# Altium PCB NTC_5_Shoulder.PcbDoc
Units mm, origin at the board's own origin, x right, y up, seen from the top; angles counter-clockwise.
Board outline 140 x 10 mm, 2 copper layers (Top Layer, Bottom Layer); 22 components, 10 nets, 22 pads, 0 vias.
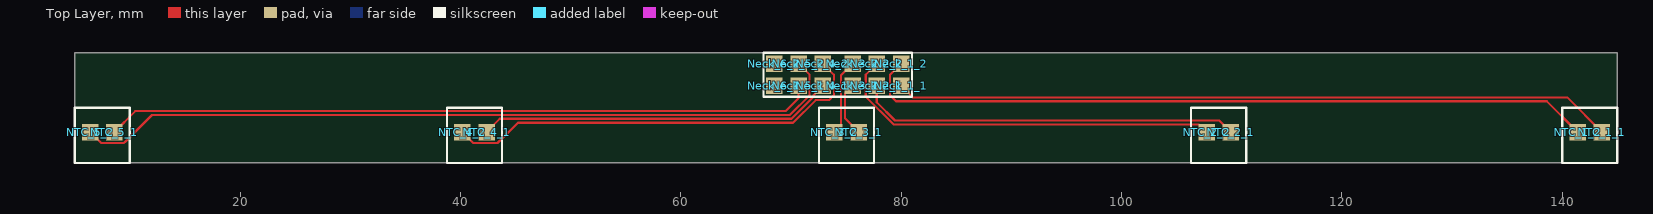
[diagram p0: Top Layer view]
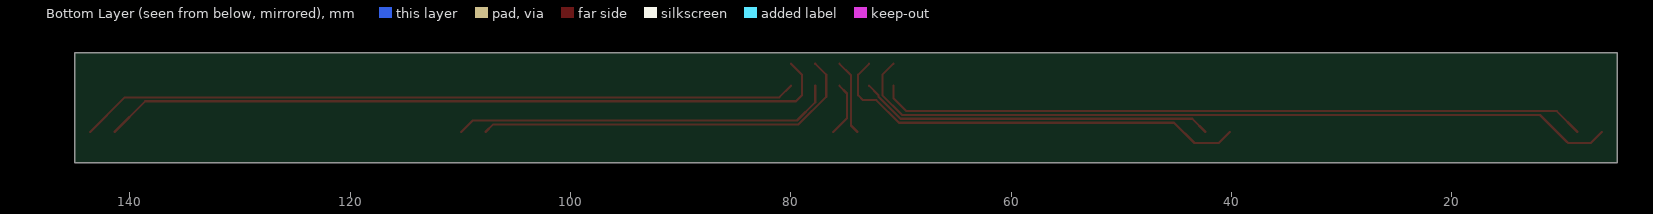
[diagram p1: Bottom Layer view, seen from below]

## Layer stack, top to bottom
Top Solder: solder mask 0.0102, Solder Resist, Dk 3.5
Top Layer: signal copper 0.035
Dielectric 1: dielectric 0.32, FR-4, Dk 4.8
Bottom Layer: signal copper 0.035
Bottom Solder: solder mask 0.0102, Solder Resist, Dk 3.5

## Board outline
5,5 145,5 145,15 5,15

## Design rules (kind name [scope] priority, off if disabled: settings)
Clearance [All] p1: gap=0.15 ignorepadtopadclearanceinfootprint=FALSE except(0: Arc-Hole Track-Hole SMDPad-Hole THPad-Hole Via-Hole Fill-Hole Poly-Hole Region-Hole Text-Hole)
PolygonConnect [All] p1: connectstyle=Relief reliefconductorwidth=0.254 reliefentries=4 polygonreliefangle="90 Angle" airgapwidth=0.254
RoutingVias [All] p1: holewidth=0.5 width=1 viastyle="Through Hole" minholewidth=0.3 minwidth=0.45 maxholewidth=6.3 maxwidth=10
SolderMaskExpansion [All] p1: expansion=0.102 istentingtop=FALSE
Width [All] p1: maxlimit=5 minlimit=0.15 preferedwidth=0.25 minimp=50.000000 maximp=50.000000 favimp=50.000000
30 further rules are at their usual default settings.

## Classes and differential pairs
component class NTC_Neck5: Neck_1_2 Neck_2_2 Neck_4_1 Neck_4_2 Neck_5_2 Neck_6_2 NTC_1_2 NTC_2_1 NTC_2_2 NTC_3_2 NTC_5_2

## Components (designator, comment, footprint, x,y, rotation, side; value= is the part's Value field where it differs from the comment)
Neck_1_1 "Pad" Generic_Pad_1.5x1.5#1 133.9,16.65 r90 top
Neck_1_2 "Pad" Generic_Pad_1.5x1.5#2 130.9,19.4 r90 top
Neck_2_1 "Pad" Generic_Pad_1.5x1.5#3 116,16.7 r90 top
Neck_2_2 "Pad" Generic_Pad_1.5x1.5#4 110.1,19.55 r90 top
Neck_3_1 "Pad" Generic_Pad_1.5x1.5#5 95.9,16.95 r90 top
Neck_3_2 "Pad" Generic_Pad_1.5x1.5#6 91.7,19.6 r90 top
Neck_4_1 "Pad" Generic_Pad_1.5x1.5#7 74.9,16.85 r90 top
Neck_4_2 "Pad" Generic_Pad_1.5x1.5#8 69.35,19.75 r90 top
Neck_5_1 "Pad" Generic_Pad_1.5x1.5#9 55.2,17.45 r90 top
Neck_5_2 "Pad" Generic_Pad_1.5x1.5#10 50.3,20.9 r90 top
Neck_6_1 "Pad" Generic_Pad_1.5x1.5#11 33.75,17.85 r90 top
Neck_6_2 "Pad" Generic_Pad_1.5x1.5#12 30.1,20.25 r90 top
NTC_1_1 "Pad" Generic_Pad_1.5x1.5#13 139.45,7.85 r90 top
NTC_1_2 "Pad" Generic_Pad_1.5x1.5#14 127.2,7.85 r90 top
NTC_2_1 "Pad" Generic_Pad_1.5x1.5#15 114.25,7.85 r90 top
NTC_2_2 "Pad" Generic_Pad_1.5x1.5#16 101.3,7.85 r90 top
NTC_3_1 "Pad" Generic_Pad_1.5x1.5#17 80.6,7.85 r90 top
NTC_3_2 "Pad" Generic_Pad_1.5x1.5#18 69.1,7.85 r90 top
NTC_4_1 "Pad" Generic_Pad_1.5x1.5#19 57.1,7.85 r90 top
NTC_4_2 "Pad" Generic_Pad_1.5x1.5#20 46,7.85 r90 top
NTC_5_1 "Pad" Generic_Pad_1.5x1.5#21 34.15,8.1 r90 top
NTC_5_2 "Pad" Generic_Pad_1.5x1.5#22 23.1,8 r90 top

## Footprints (in the part's own frame and the unit in brackets; to place one, negate y for a bottom-side part, rotate by r counter-clockwise, add the part's x,y. Pads: shape width x height; smd on the part's side, far side on the other; paste and mask are expansions set on the pad)
Generic_Pad_1.5x1.5#1 [mm] "1.5mm x 1.5mm Pad"
  rect 1.5x1.5 smd: P(-4.65,53.9)
Generic_Pad_1.5x1.5#2 [mm] "1.5mm x 1.5mm Pad"
  rect 1.5x1.5 smd: P(-5.4,50.9)
Generic_Pad_1.5x1.5#3 [mm] "1.5mm x 1.5mm Pad"
  rect 1.5x1.5 smd: P(-4.7,38.2)
Generic_Pad_1.5x1.5#4 [mm] "1.5mm x 1.5mm Pad"
  rect 1.5x1.5 smd: P(-5.55,32.3)
Generic_Pad_1.5x1.5#5 [mm] "1.5mm x 1.5mm Pad"
  rect 1.5x1.5 smd: P(-4.95,20.3)
Generic_Pad_1.5x1.5#6 [mm] "1.5mm x 1.5mm Pad"
  rect 1.5x1.5 smd: P(-5.6,16.1)
Generic_Pad_1.5x1.5#7 [mm] "1.5mm x 1.5mm Pad"
  rect 1.5x1.5 smd: P(-4.85,2)
Generic_Pad_1.5x1.5#8 [mm] "1.5mm x 1.5mm Pad"
  rect 1.5x1.5 smd: P(-5.75,-3.55)
Generic_Pad_1.5x1.5#9 [mm] "1.5mm x 1.5mm Pad"
  rect 1.5x1.5 smd: P(-5.45,-15.5)
Generic_Pad_1.5x1.5#10 [mm] "1.5mm x 1.5mm Pad"
  rect 1.5x1.5 smd: P(-6.9,-20.4)
Generic_Pad_1.5x1.5#11 [mm] "1.5mm x 1.5mm Pad"
  rect 1.5x1.5 smd: P(-5.85,-34.75)
Generic_Pad_1.5x1.5#12 [mm] "1.5mm x 1.5mm Pad"
  rect 1.5x1.5 smd: P(-6.25,-38.4)
Generic_Pad_1.5x1.5#13 [mm] "1.5mm x 1.5mm Pad"
  rect 1.5x1.5 smd: P(-0.05,-4.15)
Generic_Pad_1.5x1.5#14 [mm] "1.5mm x 1.5mm Pad"
  rect 1.5x1.5 smd: P(-0.05,-14.2)
Generic_Pad_1.5x1.5#15 [mm] "1.5mm x 1.5mm Pad"
  rect 1.5x1.5 smd: P(-0.05,4.328)
Generic_Pad_1.5x1.5#16 [mm] "1.5mm x 1.5mm Pad"
  rect 1.5x1.5 smd: P(-0.05,-6.422)
Generic_Pad_1.5x1.5#17 [mm] "1.5mm x 1.5mm Pad"
  rect 1.5x1.5 smd: P(-0.05,4.452)
Generic_Pad_1.5x1.5#18 [mm] "1.5mm x 1.5mm Pad"
  rect 1.5x1.5 smd: P(-0.05,-4.848)
Generic_Pad_1.5x1.5#19 [mm] "1.5mm x 1.5mm Pad"
  rect 1.5x1.5 smd: P(-0.05,14.726)
Generic_Pad_1.5x1.5#20 [mm] "1.5mm x 1.5mm Pad"
  rect 1.5x1.5 smd: P(-0.05,5.826)
Generic_Pad_1.5x1.5#21 [mm] "1.5mm x 1.5mm Pad"
  rect 1.5x1.5 smd: P(-0.3,25.55)
Generic_Pad_1.5x1.5#22 [mm] "1.5mm x 1.5mm Pad"
  rect 1.5x1.5 smd: P(-0.2,16.7)

## Part data
Neck_1_1 Neck_1_2 Neck_2_1 Neck_2_2 Neck_3_1 Neck_3_2 Neck_4_1 Neck_4_2 Neck_5_1 Neck_5_2 Neck_6_1 Neck_6_2 NTC_1_1 NTC_1_2 NTC_2_1 NTC_2_2 NTC_3_1 NTC_3_2 NTC_4_1 NTC_4_2 NTC_5_1 NTC_5_2: library part Generic_Pad_1.5x1.5, "Pad 1.5mm x 1.5mm"

## Nets (pads, with @x,y where several pads share a name; then routed paths per layer and width w, separated by ;. In a path a pad name is that pad's centre, name@x,y a point inside that pad or via, vN(x,y) a via of type N, cw(c..) or ccw(c..) an arc to the next point about the centre after c; other vN are vias at no path point)
NetNeck_1_1_P: Neck_1_1.P NTC_1_1.P | length 65.3
  Top Layer w0.2: Neck_1_1.P 81.05,10.95 140.45,10.95 NTC_1_1.P
NetNeck_1_2_P: Neck_1_2.P NTC_1_2.P | length 67.1
  Top Layer w0.2: Neck_1_2.P 79,13 79,11.146 79.546,10.6 138.6,10.6 NTC_1_2.P
NetNeck_2_1_P: Neck_2_1.P NTC_2_1.P | length 34.7
  Top Layer w0.2: Neck_2_1.P 77.8,10.5 79.45,8.85 108.872,8.85 NTC_2_1.P
NetNeck_2_2_P: Neck_2_2.P NTC_2_2.P | length 35.7
  Top Layer w0.2: Neck_2_2.P 76.8,13 76.8,11.005 79.305,8.5 107.022,8.5 NTC_2_2.P
NetNeck_3_1_P: Neck_3_1.P NTC_3_1.P | length 5
  Top Layer w0.2: Neck_3_1.P 74.9,11.3 74.9,9.048 NTC_3_1.P
NetNeck_3_2_P: Neck_3_2.P NTC_3_2.P | length 6.9
  Top Layer w0.2: NTC_3_2.P 74.55,8.402 74.55,12.95 Neck_3_2.P
NetNeck_4_1_P: Neck_4_1.P NTC_4_1.P | length 32.4
  Top Layer w0.2: NTC_4_1.P 43.574,9 70.049,9 72.05,11.001 72.05,11.15 Neck_4_1.P
NetNeck_4_2_P: Neck_4_2.P NTC_4_2.P | length 39.2
  Top Layer w0.2: NTC_4_2.P 41.174,6.8 41.52,6.8 43.374,6.8 45.224,8.65 70.194,8.65 72.243,10.7 73.454,10.7 73.9,11.146 73.9,12.3 73.9,13 Neck_4_2.P
NetNeck_5_1_P: Neck_5_1.P NTC_5_1.P | length 64.5
  Top Layer w0.2: NTC_5_1.P 10.5,9.7 69.5,9.7 70.7,10.9 Neck_5_1.P
NetNeck_5_2_P: Neck_5_2.P NTC_5_2.P | length 70.8
  Top Layer w0.2: NTC_5_2.P 7.4,6.8 7.746,6.8 9.454,6.8 9.6,6.946 12.004,9.35 69.904,9.35 71.7,11.146 71.7,13 Neck_5_2.P
pads on no net: Neck_6_1.P Neck_6_2.P

## Silkscreen, mask and mechanical layers (free items; w line width, h text height)
Top Overlay:
  lines w0.2: 5,5 10,5 10,10 5,10 5,5 ; 38.774,5 43.774,5 43.774,10 38.774,10 38.774,5 ; 67.5,11 81,11 81,15 67.5,15 67.5,11 ; 72.548,5 77.548,5 77.548,10 72.548,10 72.548,5 ; 106.322,5 111.322,5 111.322,10 106.322,10 106.322,5 ; 140,5 145,5 145,10 140,10 140,5
Board Outline:
  the board outline again, w0.1